# EAGLE board bottom (EAGLE 5.11)
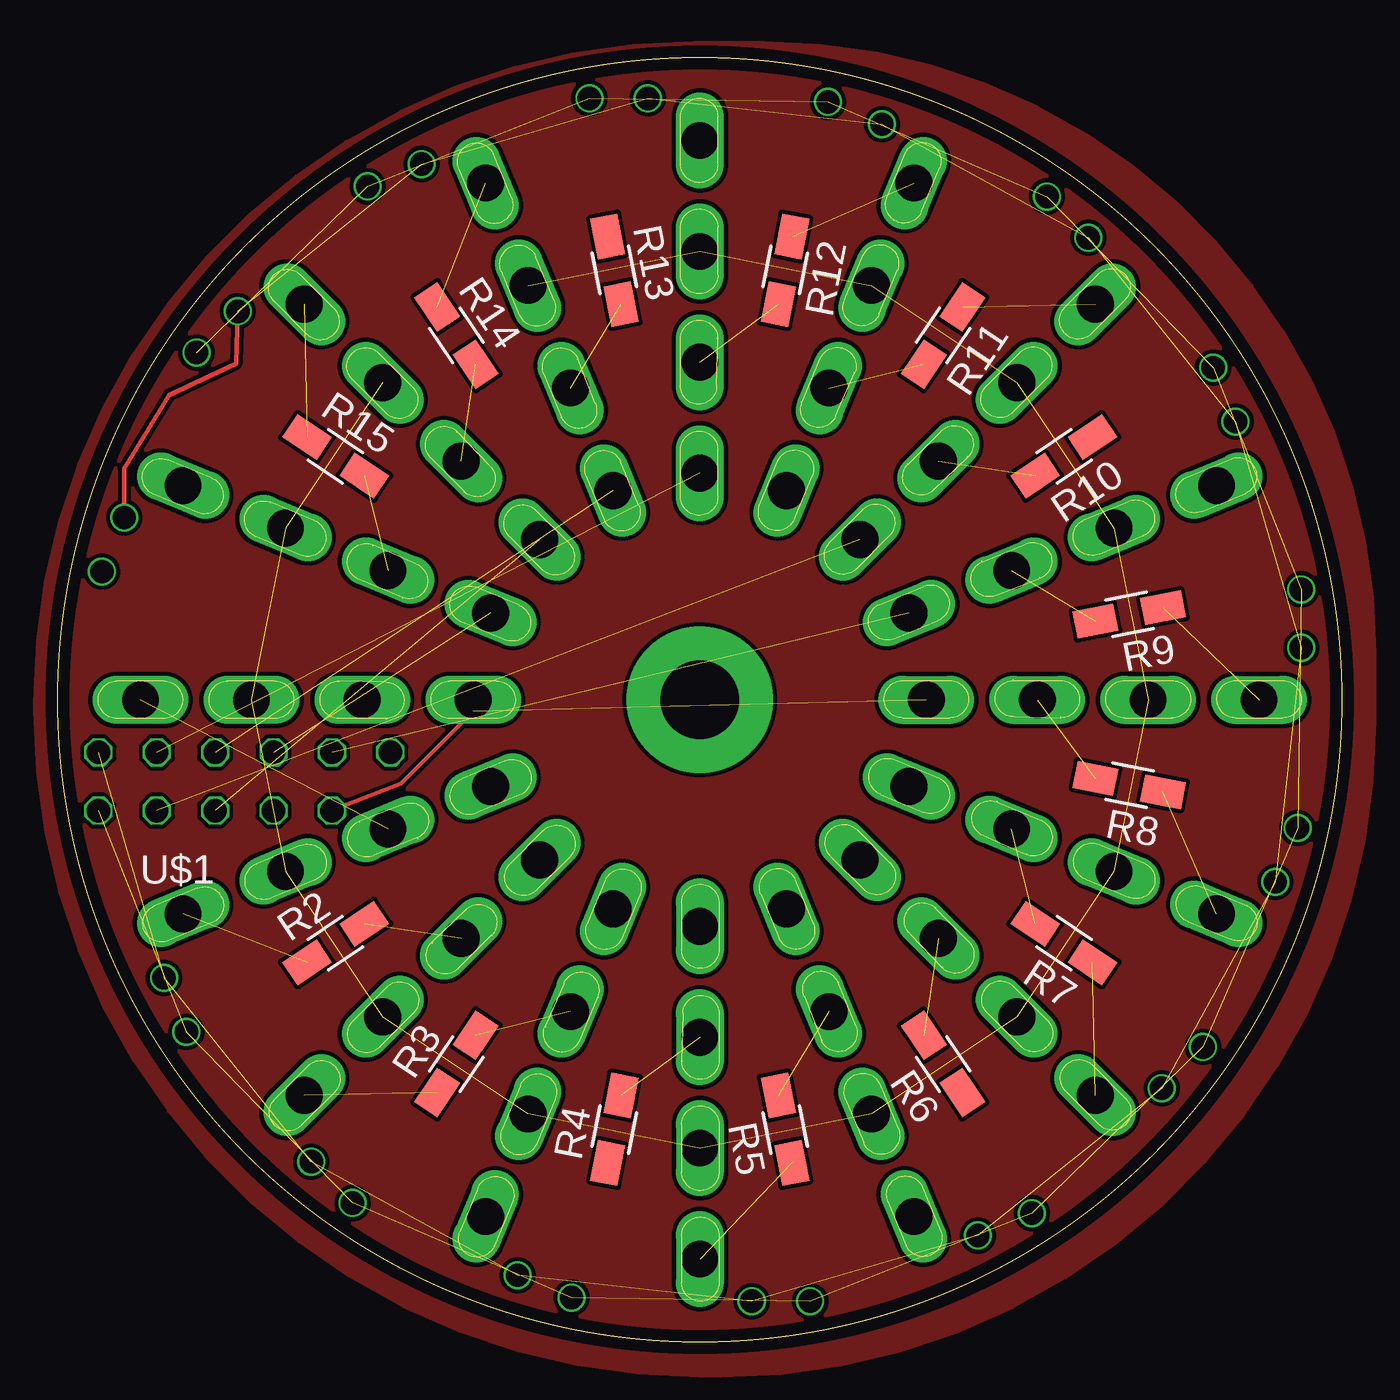
[diagram p0: board, top side]
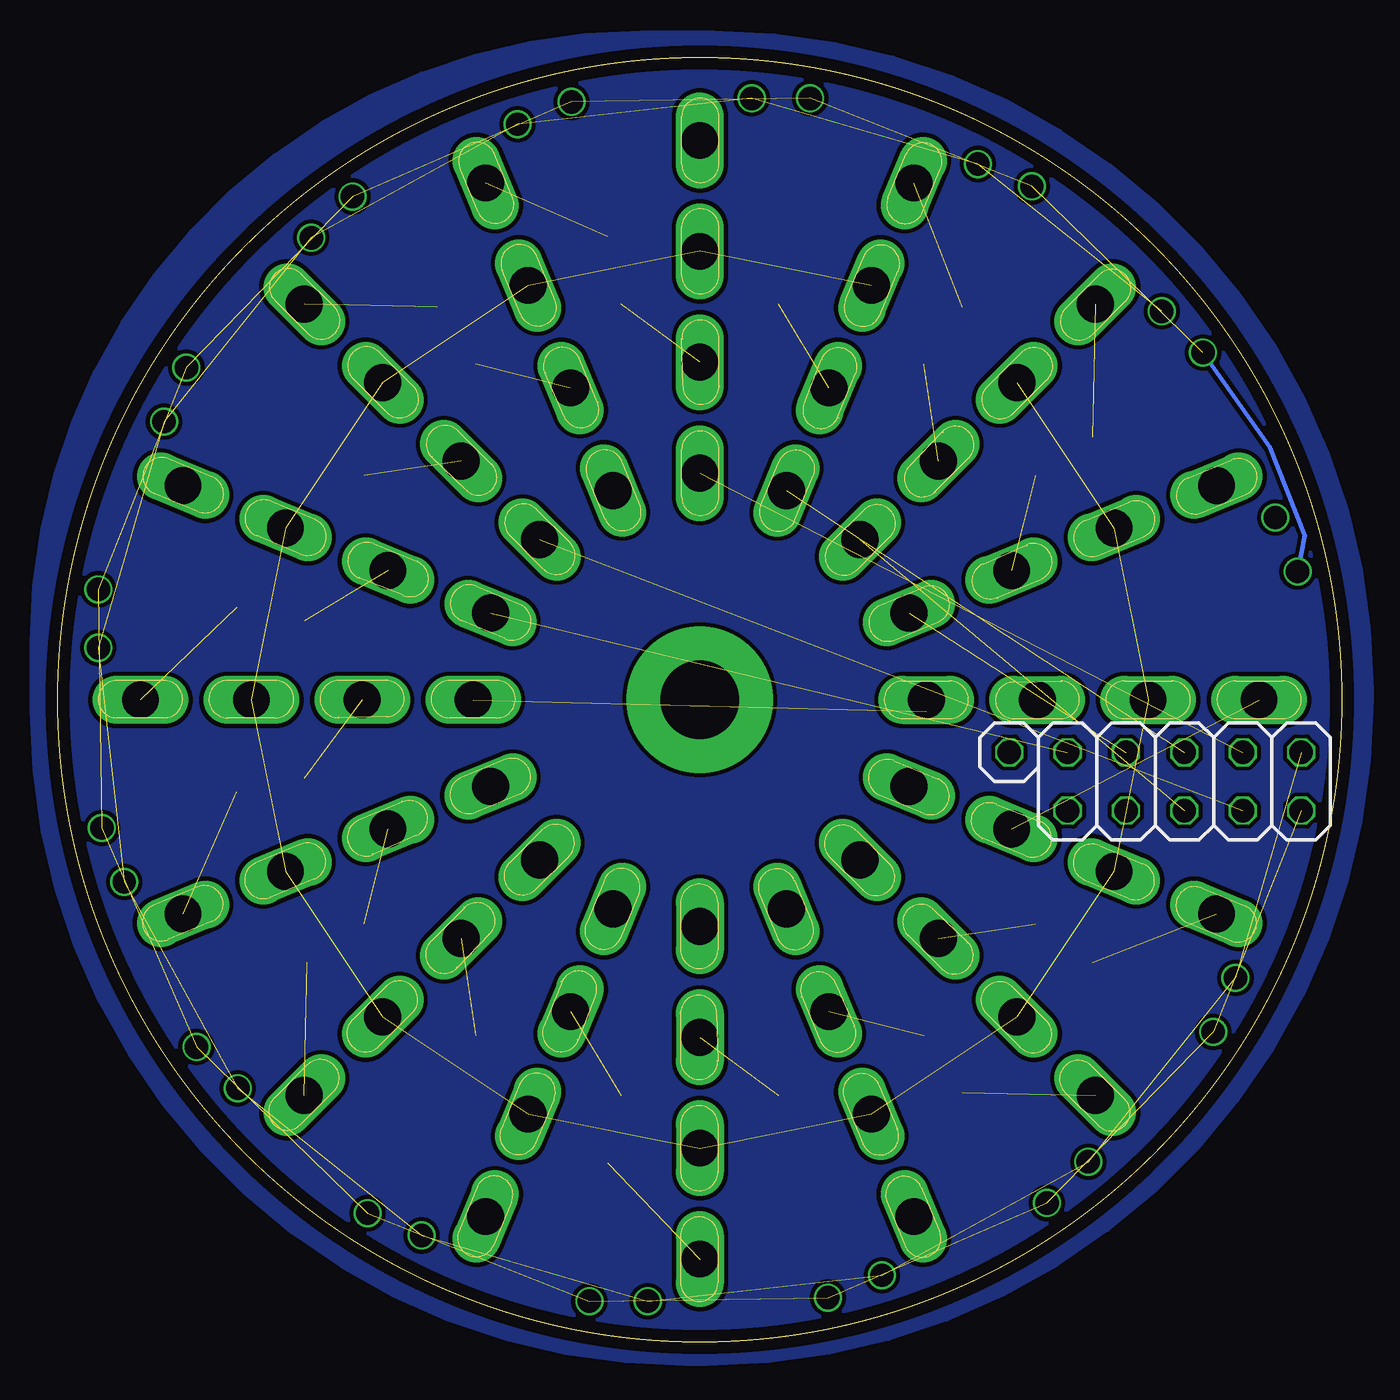
[diagram p1: board, bottom side, seen from below]

Size 55.88 x 55.88 mm. Coordinates in mm from the lower left corner, seen from the top.
Outline: circle at 27.94,27.94 radius 27.94
Copper layers (1*16): Top 0.0356mm / dielectric 1.5011mm / Bottom 0.0356mm
Design rules "SilverCircuits-tented *": minimum track width 7mil, minimum drill 14mil, track to track 7mil, track to pad 7mil, pad to pad 7mil, via to via 7mil, smd to smd 0mil, copper to edge 20mil, drill to drill 8mil, minimum pad ring 0mil, minimum via ring 8mil, stop-mask expansion 4mil, vias tented up to drill 14mil, thermal gap 10mil

## Footprints (pad centres in the part's own frame; a part is rotated, then mirrored left to right if it is on the bottom)
R1206W = smd 1.8 x 1.2: 1 -1.499,0; 2 1.499,0
SLICE_SOCKET = drill 1.6 pad 2.095 long: P$1 0,0; P$2 4.826,0; P$3 9.652,0; P$4 14.478,0
SLICE_SOCKET_W_1X2 = drill 1.6 pad 2.095 long: P$1 0,0; P$2 -4.826,0; P$3 -9.652,0; P$4 -14.478,0 | drill 1.016 round: P$5 -16.307,-2.261; P$6 -16.307,-4.801
2X6_MINUS1_FM = drill 1.016 octagon: 2 6.35,1.27; 3 3.81,-1.27; 4 3.81,1.27; 5 1.27,-1.27; 6 1.27,1.27; 7 -1.27,-1.27; 8 -1.27,1.27; 9 -3.81,-1.27; 10 -3.81,1.27; 11 -6.35,-1.27; 12 -6.35,1.27

## Placement (x,y rotation side)
R2  0ohm  [R1206W]  12.1,17.36 33.8 top
R3  0ohm  [R1206W]  17.36,12.1 56.2 top
R4  0ohm  [R1206W]  24.22,9.26 78.8 top
R5  0ohm  [R1206W]  31.66,9.26 101.2 top
R6  0ohm  [R1206W]  38.52,12.1 123.8 top
R7  0ohm  [R1206W]  43.78,17.36 146.2 top
R8  0ohm  [R1206W]  46.62,24.22 168.8 top
R9  0ohm  [R1206W]  46.62,31.66 191.2 top
R10  0ohm  [R1206W]  43.78,38.52 213.8 top
R11  0ohm  [R1206W]  38.52,43.78 236.2 top
R12  0ohm  [R1206W]  31.66,46.62 258.8 top
R13  0ohm  [R1206W]  24.22,46.62 281.2 top
R14  0ohm  [R1206W]  17.36,43.78 303.8 top
R15  0ohm  [R1206W]  12.1,38.52 326.2 top
SLICE1  SLICE_SOCKET  [SLICE_SOCKET]  18.08,27.94 180 top
SLICE2  SOCKET_W_1X2  [SLICE_SOCKET_W_1X2]  18.84,24.17 22.5 top
SLICE3  SOCKET_W_1X2  [SLICE_SOCKET_W_1X2]  20.97,20.97 45 top
SLICE4  SOCKET_W_1X2  [SLICE_SOCKET_W_1X2]  24.17,18.84 67.5 top
SLICE5  SOCKET_W_1X2  [SLICE_SOCKET_W_1X2]  27.94,18.08 90 top
SLICE6  SOCKET_W_1X2  [SLICE_SOCKET_W_1X2]  31.71,18.84 112.5 top
SLICE7  SOCKET_W_1X2  [SLICE_SOCKET_W_1X2]  34.91,20.97 135 top
SLICE8  SOCKET_W_1X2  [SLICE_SOCKET_W_1X2]  37.05,24.17 157.5 top
SLICE9  SOCKET_W_1X2  [SLICE_SOCKET_W_1X2]  37.8,27.94 180 top
SLICE10  SOCKET_W_1X2  [SLICE_SOCKET_W_1X2]  37.05,31.71 202.5 top
SLICE11  SOCKET_W_1X2  [SLICE_SOCKET_W_1X2]  34.91,34.91 225 top
SLICE12  SOCKET_W_1X2  [SLICE_SOCKET_W_1X2]  31.71,37.05 247.5 top
SLICE13  SOCKET_W_1X2  [SLICE_SOCKET_W_1X2]  27.94,37.8 270 top
SLICE14  SOCKET_W_1X2  [SLICE_SOCKET_W_1X2]  24.17,37.05 292.5 top
SLICE15  SOCKET_W_1X2  [SLICE_SOCKET_W_1X2]  20.97,34.91 315 top
SLICE16  SOCKET_W_1X2  [SLICE_SOCKET_W_1X2]  18.84,31.71 337.5 top
U$1  2X6_MINUS1FEMALE  [2X6_MINUS1_FM]  8.13,24.38 0 top

## Library data of the parts
R2-R15 = resistor
SLICE1 U$1 = slice
SLICE2-SLICE16 = bottom

## Nets
BLANK: SLICE2.P$5 SLICE3.P$5 SLICE4.P$5 SLICE5.P$5 SLICE6.P$5 SLICE7.P$5 SLICE8.P$5 SLICE9.P$5 SLICE10.P$5 SLICE11.P$5 SLICE12.P$5 SLICE13.P$5 SLICE14.P$5 SLICE15.P$5 SLICE16.P$5 U$1.12
N$1: R2.1 SLICE2.P$4
N$2: R3.1 SLICE3.P$4
N$3: SLICE4.P$4
N$4: R8.1 SLICE8.P$4
N$5: R7.1 SLICE7.P$4
N$6: SLICE6.P$4
N$7: R5.1 SLICE5.P$4
N$8: R9.1 SLICE9.P$4
N$9: SLICE10.P$4
N$10: R11.1 SLICE11.P$4
N$11: R12.1 SLICE12.P$4
N$15: R15.1 SLICE15.P$4
N$16: R14.1 SLICE14.P$4
N$17: R13.1
SCLK: SLICE2.P$6 SLICE3.P$6 SLICE4.P$6 SLICE5.P$6 SLICE6.P$6 SLICE7.P$6 SLICE8.P$6 SLICE9.P$6 SLICE10.P$6 SLICE11.P$6 SLICE12.P$6 SLICE13.P$6 SLICE14.P$6 SLICE15.P$6 SLICE16.P$6 U$1.11
SIN1: SLICE1.P$2
SLICE1: SLICE1.P$1
SLICE2: SLICE2.P$1
SLICE3: SLICE3.P$1
SLICE4: SLICE4.P$1
SLICE5: SLICE5.P$1
SLICE6: SLICE6.P$1
SLICE7: SLICE7.P$1
SLICE8: SLICE8.P$1
SLICE9: SLICE9.P$1 U$1.3
SLICE10: SLICE10.P$1 U$1.4
SLICE11: SLICE11.P$1 U$1.9
SLICE12: SLICE12.P$1
SLICE13: SLICE13.P$1 U$1.10
SLICE14: SLICE14.P$1 U$1.8
SLICE15: SLICE15.P$1 U$1.7
SLICE16: SLICE16.P$1 U$1.6
SLICE17: U$1.5
SOUT1: SLICE1.P$4 SLICE2.P$2
SOUT2: R2.2 SLICE3.P$2
SOUT3: R3.2 SLICE4.P$2
SOUT4: R4.2 SLICE5.P$2
SOUT5: R5.2 SLICE6.P$2
SOUT6: R6.2 SLICE7.P$2
SOUT7: R7.2 SLICE8.P$2
SOUT8: R8.2 SLICE9.P$2
SOUT9: R9.2 SLICE10.P$2
SOUT10: R10.2 SLICE11.P$2
SOUT11: R11.2 SLICE12.P$2
SOUT12: R12.2 SLICE13.P$2
SOUT13: R13.2 SLICE14.P$2
SOUT14: R14.2 SLICE15.P$2
SOUT15: R15.2 SLICE16.P$2
XLAT: SLICE1.P$3 SLICE2.P$3 SLICE3.P$3 SLICE4.P$3 SLICE5.P$3 SLICE6.P$3 SLICE7.P$3 SLICE8.P$3 SLICE9.P$3 SLICE10.P$3 SLICE11.P$3 SLICE12.P$3 SLICE13.P$3 SLICE14.P$3 SLICE15.P$3 SLICE16.P$3

## Tracks (layer width: path | path; a pad name or v marks a point on that pad's centre or on a via)
BLANK  (14 unrouted)
  Top 0.203: SLICE16.P$5 2.9,38 4.85,41.2 7.77,42.57 SLICE15.P$5
GND
  pour Top: 27.66,56.49 arc90 -0.99,27.84 -0.99,27.48 arc90 27.94,-1.45 28.85,-1.45 arc90 57.3,27 57.3,29.95 arc90 30.76,56.49 27.69,56.49
  pour Bottom: 27.36,56.97 arc90 -1.3,28.32 -1.3,27.97 arc90 27.64,-0.97 28.55,-0.97 arc90 57,27.48 57,30.43 arc90 30.45,56.97 27.38,56.97
N$1  (1 unrouted)
N$2  (1 unrouted)
N$4  (1 unrouted)
N$5  (1 unrouted)
N$7  (1 unrouted)
N$8  (1 unrouted)
N$10  (1 unrouted)
N$11  (1 unrouted)
N$12  (via drill 3.43 pad 6.35)
  other vias: 27.94,27.94
N$15  (1 unrouted)
N$16  (1 unrouted)
SCLK  (14 unrouted)
  Bottom 0.203: SLICE15.P$6 3.15,38.94 1.63,35.08 SLICE16.P$6
SLICE9  (1 unrouted)
  Top 0.178: 18.09,27.43 14.94,24.28 U$1.3
SLICE10  (1 unrouted)
SLICE11  (1 unrouted)
SLICE13  (1 unrouted)
SLICE14  (1 unrouted)
SLICE15  (1 unrouted)
SLICE16  (1 unrouted)
SOUT1  (1 unrouted)
SOUT2  (1 unrouted)
SOUT3  (1 unrouted)
SOUT4  (1 unrouted)
SOUT5  (1 unrouted)
SOUT6  (1 unrouted)
SOUT7  (1 unrouted)
SOUT8  (1 unrouted)
SOUT9  (1 unrouted)
SOUT10  (1 unrouted)
SOUT11  (1 unrouted)
SOUT12  (1 unrouted)
SOUT13  (1 unrouted)
SOUT14  (1 unrouted)
SOUT15  (1 unrouted)
XLAT  (15 unrouted)